# Altium PCB 数粒机发射板2通道.PcbDoc
Units mm, origin at the board's own origin, x right, y up, seen from the top; angles counter-clockwise.
Board outline 152 x 52 mm, 4 copper layers (TopLayer, MidLayer1, MidLayer2, BottomLayer); 17 components, 25 nets, 56 pads, 0 vias.
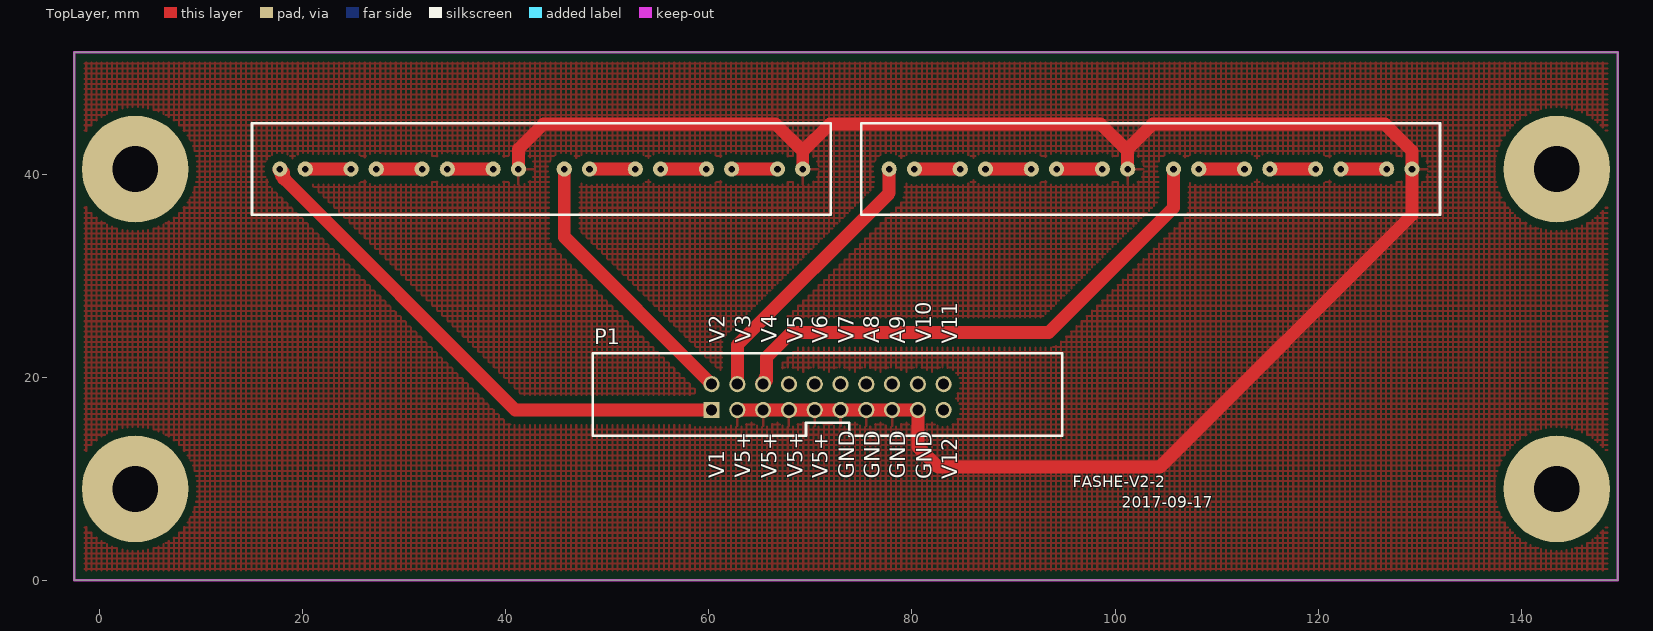
[diagram p0: TopLayer view]
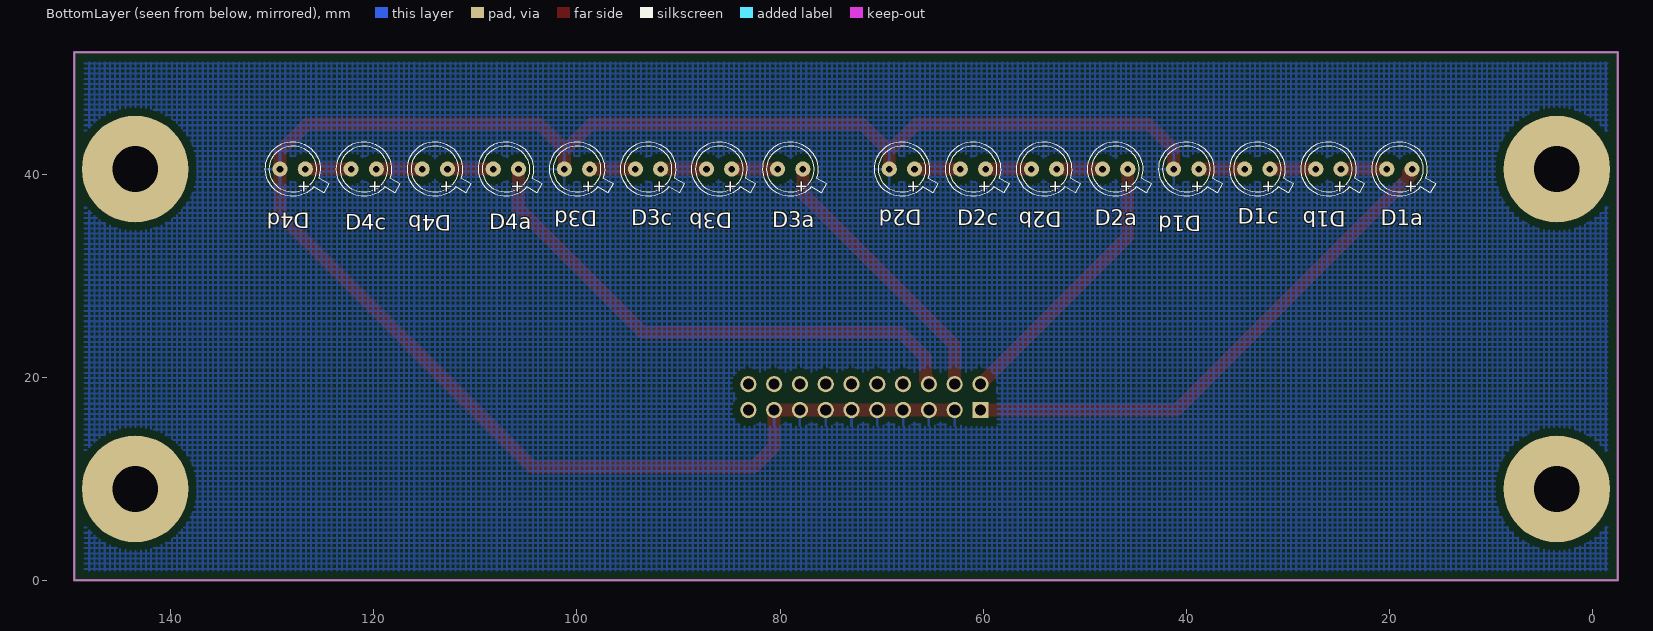
[diagram p1: BottomLayer view, seen from below]

## Layer stack, top to bottom
TopLayer: signal copper 0.0356
Dielectric: core 0.32, FR-4, Dk 4.8
MidLayer1: signal copper 0.0356
Dielectric: dielectric 0.32, FR-4, Dk 4.8
MidLayer2: signal copper 0.0356
Dielectric: dielectric 0.32, FR-4, Dk 4.8
BottomLayer: signal copper 0.0356

## Board outline
-2.5,0 149.5,0 149.5,52 -2.5,52

## Design rules (kind name [scope] priority, off if disabled: settings)
Clearance [All] p1: gap=0.762
PolygonConnect [All] p1: connectstyle=Relief reliefconductorwidth=0.254 reliefentries=4 polygonreliefangle="90 Angle"
RoutingLayers [All] p1: top layer_v5=TRUE mid layer 1_v5=FALSE mid layer 2_v5=FALSE bottom layer_v5=TRUE
RoutingVias RoutingVias_1 [All] p1: holewidth=1 width=2 viastyle="Through Hole" minholewidth=0.711 minwidth=1.27 maxholewidth=1 maxwidth=2
SilkscreenOverComponentPads [All] p1: minsilkscreentomaskgap=0.254
SolderMaskExpansion [All] p1: expansion=0.102
TestPointUsage [All] p1: valid=0 allowmultiple=FALSE
Testpoint [All] p1: side=3 testpointundercomponent=TRUE minsize=1.016 maxsize=2.54 preferedsize=1.524 minholesize=0.508 maxholesize=1.016 preferedholesize=0.813 testpointgrid=0.025 style=297 order=0123456789
Width [All] p1: maxlimit=4.54 minlimit=0.2 preferedwidth=1
22 further rules are at their usual default settings.

## Components (designator, comment, footprint, x,y, rotation, side; value= is the part's Value field where it differs from the comment)
D1a "红外接收珠子" EL-1KL3 17.75,40.5 r0 bottom
D1b "红外接收珠子" EL-1KL3 24.75,40.5 r0 bottom
D1c "红外接收珠子" EL-1KL3 31.75,40.5 r0 bottom
D1d "红外接收珠子" EL-1KL3 38.75,40.5 r0 bottom
D2a "红外接收珠子" EL-1KL3 45.75,40.5 r0 bottom
D2b "红外接收珠子" EL-1KL3 52.75,40.5 r0 bottom
D2c "红外接收珠子" EL-1KL3 59.75,40.5 r0 bottom
D2d "红外接收珠子" EL-1KL3 66.75,40.5 r0 bottom
D3a "红外接收珠子" EL-1KL3 77.75,40.5 r0 bottom
D3b "红外接收珠子" EL-1KL3 84.75,40.5 r0 bottom
D3c "红外接收珠子" EL-1KL3 91.75,40.5 r0 bottom
D3d "红外接收珠子" EL-1KL3 98.75,40.5 r0 bottom
D4a "红外接收珠子" EL-1KL3 105.75,40.5 r0 bottom
D4b "红外接收珠子" EL-1KL3 112.75,40.5 r0 bottom
D4c "红外接收珠子" EL-1KL3 119.75,40.5 r0 bottom
D4d "红外接收珠子" EL-1KL3 126.75,40.5 r0 bottom
P1 "Header 10X2" niujiaocha20p 60.258,16.779 r0 top (schematic designator P)

## Footprints (in the part's own frame and the unit in brackets; to place one, negate y for a bottom-side part, rotate by r counter-clockwise, add the part's x,y. Pads: shape width x height; smd on the part's side, far side on the other; paste and mask are expansions set on the pad)
EL-1KL3 [mm]
  round 1.5 hole 0.65: 1(0,0) 2(2.49,0)
  silkscreen extent -2.31,-2.7 3.93,2.7
niujiaocha20p [mm]
  rect 1.6x1.6 hole 1.1: 1(0,0)
  round 1.6 hole 1.1: 2(0,2.54) 3(2.54,0) 4(2.54,2.54) 5(5.08,0) 6(5.08,2.54) 7(7.62,0) 8(7.62,2.54) 9(10.16,0) 10(10.16,2.54) 11(12.7,0) 12(12.7,2.54) 13(15.24,0) 14(15.24,2.54) 15(17.78,0) 16(17.78,2.54) 17(20.32,0) 18(20.32,2.54) 19(22.86,0) 20(22.86,2.54)
  silkscreen extent -11.68,-2.54 34.54,5.59

## Part data
D1a D1b D1c D1d D2a D2b D2c D2d D3a D3b D3c D3d D4a D4b D4c D4d: library part LED0, "PD15-"
P1: "Header, 10-Pin, D"

## Free pads (board coordinates)
  round 10.5 hole 4.5 unplated: 1(3.5,40.5) 2(3.5,9) 3(143.5,9) 4(143.5,40.5)

## Nets (pads, with @x,y where several pads share a name; then routed paths per layer and width w, separated by ;. In a path a pad name is that pad's centre, name@x,y a point inside that pad or via, vN(x,y) a via of type N, cw(c..) or ccw(c..) an arc to the next point about the centre after c; other vN are vias at no path point)
GND: D1d.2 D2d.2 D3d.2 D4d.2 P1.3 P1.5 P1.7 P1.9 P1.11 P1.13 P1.15 P1.17 | length 189.4
  TopLayer w1.27: D1d.2 41.24,42.475 43.71,44.945 66.565,44.945 69.24,42.27 ; P1.3 P1.5 P1.7 P1.9 P1.11 P1.13 P1.15 P1.17 80.578,13.152 82.585,11.145 104.41,11.145 129.24,35.975 D4d.2 129.24,42.27 126.565,44.945 103.71,44.945 101.24,42.475 D3d.2 101.24,42.27 98.565,44.945 71.915,44.945 69.24,42.27 ; D2d.2 69.24,42.27
NetD1a_2: D1a.2 D1b.1 | length 4.5
  TopLayer w1.27: D1a.2 D1b.1
NetD1b_2: D1b.2 D1c.1 | length 4.5
  TopLayer w1.27: D1b.2 D1c.1
NetD1c_2: D1c.2 D1d.1 | length 4.5
  TopLayer w1.27: D1c.2 D1d.1
NetD2a_2: D2a.2 D2b.1 | length 4.5
  TopLayer w1.27: D2a.2 D2b.1
NetD2b_2: D2b.2 D2c.1 | length 4.5
  TopLayer w1.27: D2b.2 D2c.1
NetD2c_2: D2c.2 D2d.1 | length 4.5
  TopLayer w1.27: D2c.2 D2d.1
NetD3a_2: D3a.2 D3b.1 | length 4.5
  TopLayer w1.27: D3a.2 D3b.1
NetD3b_2: D3b.2 D3c.1 | length 4.5
  TopLayer w1.27: D3b.2 D3c.1
NetD3c_2: D3c.2 D3d.1 | length 4.5
  TopLayer w1.27: D3c.2 D3d.1
NetD4a_2: D4a.2 D4b.1 | length 4.5
  TopLayer w1.27: D4a.2 D4b.1
NetD4b_2: D4b.2 D4c.1 | length 4.5
  TopLayer w1.27: D4b.2 D4c.1
NetD4c_2: D4c.2 D4d.1 | length 4.5
  TopLayer w1.27: D4c.2 D4d.1
VOUT1: D1a.1 P1.1 | length 55.8
  TopLayer w1.27: D1a.1@17.678,40.41 cw(c16.987,39.547) 18.093,39.547 ; D1a.1 18.093,40.157 18.093,39.611 ; D1a.1@17.861,40.471 ccw(c18.724,40.242) 18.093,39.611 ; D1a.1@17.865,40.5 ccw(c19.462,40.5) 18.333,39.371 ; P1.1 40.925,16.779 18.093,39.611
VOUT2: D2a.1 P1.2 | length 27.2
  TopLayer w1.27: D2a.1 45.75,33.827 P1.2
VOUT3: D3a.1 P1.4 | length 27.4
  TopLayer w1.27: P1.4 62.798,23.173 77.75,38.125 D3a.1
VOUT4: D4a.1 P1.6 | length 54
  TopLayer w1.27: P1.6@65.221,19.436 ccw(c64.112,20.545) 65.681,20.545 ; P1.6 65.681,19.662 65.681,21.976 68.11,24.405 93.465,24.405 105.75,36.69 D4a.1
VOUT5: P1.8
VOUT6: P1.10
VOUT7: P1.12
VOUT8: P1.14
VOUT9: P1.16
VOUT10: P1.18
VOUT11: P1.20
VOUT12: P1.19

## Polygon pours and split planes (outlines as drawn)
GND on TopLayer "TopLayer-GND 2" (hatched 90Degree grid 0.508 track 0.508, remove dead copper, pour order 1002): 146.503,19.688
GND on TopLayer "top" (hatched 90Degree grid 0.508 track 0.203, remove dead copper, pour order 2): -2.642,52 149.606,52 149.606,0 -2.642,0
GND on BottomLayer "BottomLayer-GND 2" (hatched 90Degree grid 0.508 track 0.508, remove dead copper, pour order 1006): 298.159,33.642
GND on BottomLayer "BottomLayer-GND 3" (hatched 90Degree grid 0.508 track 0.508, remove dead copper, pour order 1007): -0.941,17.773
GND on BottomLayer "bottom" (hatched 90Degree grid 0.508 track 0.203, remove dead copper, pour order 4): -2.667,52 149.682,52 149.682,0 -2.667,0

## Keep-outs
KeepOutLayer:
  the board outline again, w0.254

## Silkscreen, mask and mechanical layers (free items; w line width, h text height)
TopOverlay:
  lines w0.254: 15,36 72,36 72,45 15,45 15,36 ; 75,36 132,36 132,45 75,45 75,36
  text "V2" at 61.569,23.418 h1.5 r90
  text "V3" at 64.104,23.418 h1.5 r90
  text "V4" at 66.689,23.418 h1.5 r90
  text "V5" at 69.219,23.363 h1.5 r90
  text "V7" at 74.284,23.363 h1.5 r90
  text "A8" at 76.784,23.363 h1.5 r90
  text "V6" at 71.694,23.333 h1.5 r90
  text "V10" at 81.904,23.333 h1.5 r90
  text "A9" at 79.314,23.308 h1.5 r90
  text "V11" at 84.434,23.308 h1.5 r90
  text "V5+" at 64.074,10.123 h1.5 r90
  text "V5+" at 69.219,10.093 h1.5 r90
  text "V1" at 61.514,10.068 h1.5 r90
  text "V5+" at 66.659,10.068 h1.5 r90
  text "V5+" at 71.724,10.038 h1.5 r90
  text "GND" at 74.309,10.008 h1.5 r90
  text "GND" at 76.814,10.008 h1.5 r90
  text "GND" at 79.344,9.983 h1.5 r90
  text "GND" at 81.929,9.953 h1.5 r90
  text "V12" at 84.434,9.953 h1.5 r90
  text "FASHE-V2-2" at 95.83,9.147 h1.1
  text "2017-09-17" at 100.675,7.145 h1.1
Mechanical1:
  lines w0.254: 15,40.5 15.5,40.5 17.75,40.5 24.75,40.5 31.75,40.5 38.75,40.5 45.75,40.5 52.75,40.5 59.75,40.5 66.75,40.5 ; 75,40.5 75.5,40.5 77.75,40.5 84.75,40.5 91.75,40.5 98.75,40.5 105.75,40.5 112.75,40.5 119.75,40.5 126.75,40.5

## Text inside footprints (layer, text, board x,y; h text height)
D1a: BottomOverlay "+" at 18.385,39.44 h1.2 r90
D1b: BottomOverlay "+" at 25.385,39.44 h1.2 r90
D1c: BottomOverlay "+" at 32.385,39.44 h1.2 r90
D1d: BottomOverlay "+" at 39.385,39.44 h1.2 r90
D2a: BottomOverlay "+" at 46.385,39.44 h1.2 r90
D2b: BottomOverlay "+" at 53.385,39.44 h1.2 r90
D2c: BottomOverlay "+" at 60.385,39.44 h1.2 r90
D2d: BottomOverlay "+" at 67.385,39.44 h1.2 r90
D3a: BottomOverlay "+" at 78.385,39.44 h1.2 r90
D3b: BottomOverlay "+" at 85.385,39.44 h1.2 r90
D3c: BottomOverlay "+" at 92.385,39.44 h1.2 r90
D3d: BottomOverlay "+" at 99.385,39.44 h1.2 r90
D4a: BottomOverlay "+" at 106.385,39.44 h1.2 r90
D4b: BottomOverlay "+" at 113.385,39.44 h1.2 r90
D4c: BottomOverlay "+" at 120.385,39.44 h1.2 r90
D4d: BottomOverlay "+" at 127.385,39.44 h1.2 r90